# Altium PCB ark.PcbDoc
Units mm, origin at the board's own origin, x right, y up, seen from the top; angles counter-clockwise.
Board outline 141.3 x 9.3 mm, 2 copper layers (Top Layer, Bottom Layer); 12 components, 2 nets, 26 pads, 0 vias.
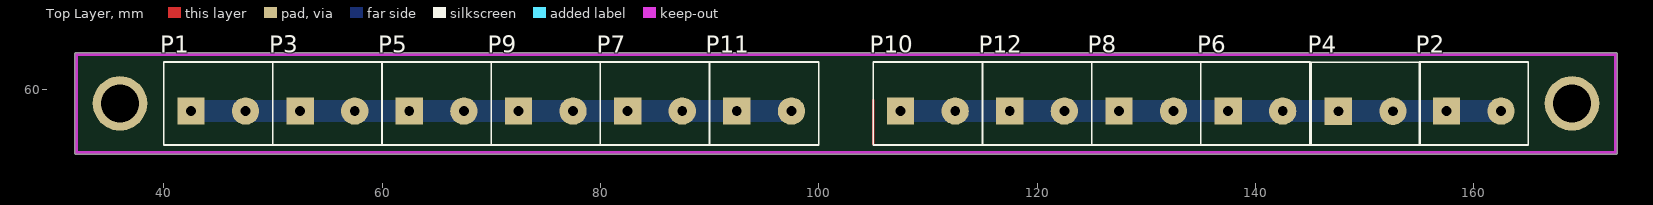
[diagram p0: Top Layer view]
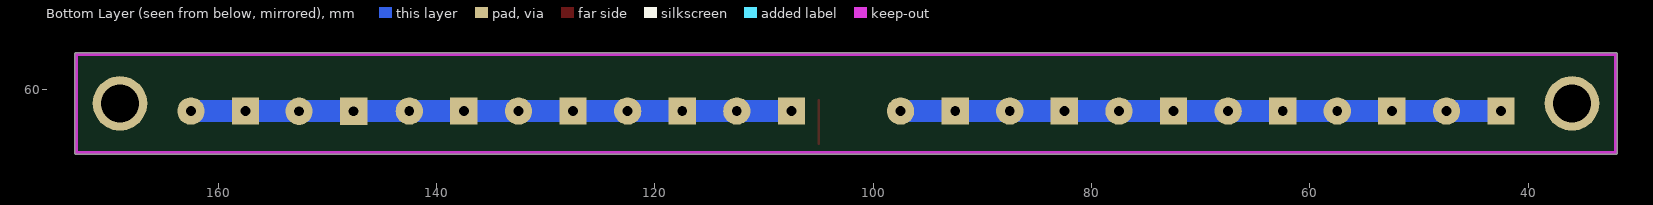
[diagram p1: Bottom Layer view, seen from below]
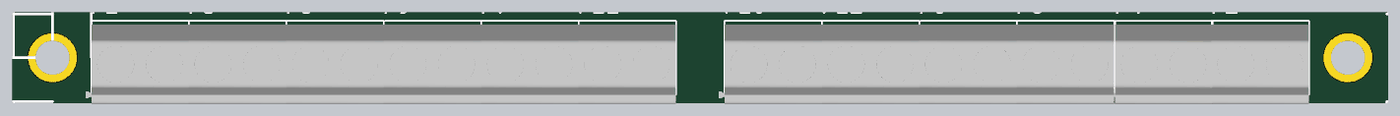
[diagram p2: 3D render of the assembled board from above, using the file's embedded part models]

## Layer stack, top to bottom
Top Layer: signal copper 0.0356
Dielectric: dielectric 0.32, FR-4, Dk 4.8
Bottom Layer: signal copper 0.0356

## Board outline
32,54.05 cw(c32,54.2) 31.85,54.2 31.85,63.2 cw(c32,63.2) 32,63.35 173,63.35 cw(c173,63.2) 173.15,63.2 173.15,54.2 cw(c173,54.2) 173,54.05

## Design rules (kind name [scope] priority, off if disabled: settings)
Clearance [All] p1: gap=0.254
ComponentClearance [All] p1 off: gap=0.254 collisioncheckmode=3 verticalgap=0.254 showdistances=FALSE
PolygonConnect [All] p1: connectstyle=Relief reliefconductorwidth=0.254 reliefentries=4 polygonreliefangle="90 Angle" airgapwidth=0.254
RoutingVias [All] p1: holewidth=0.711 width=1.27 viastyle="Through Hole" minholewidth=0.711 minwidth=1.27 maxholewidth=0.711 maxwidth=1.27
SolderMaskExpansion [All] p1: expansion=0.102
Width [All] p1: maxlimit=10 minlimit=1 preferedwidth=2
27 further rules are at their usual default settings.

## Classes and differential pairs
component class ark: P3 P4 P5 P6 P7 P8 P9 P10 P11 P12

## Components (designator, comment, footprint, x,y, rotation, side; value= is the part's Value field where it differs from the comment)
P1 "ARK 2-Pin" ARK-5mm-2pin 45,58 r0 top
P2 "ARK 2-Pin" ARK-5mm-2pin 160,58 r0 top
P3 "ARK 2-Pin" ARK-5mm-2pin 55,58 r0 top
P4 "ARK 2-Pin" ARK-5mm-2pin 150.1,57.988 r0 top
P5 "ARK 2-Pin" ARK-5mm-2pin 65,58 r0 top
P6 "ARK 2-Pin" ARK-5mm-2pin 140,58 r0 top
P7 "ARK 2-Pin" ARK-5mm-2pin 85,58 r0 top
P8 "ARK 2-Pin" ARK-5mm-2pin 130,58 r0 top
P9 "ARK 2-Pin" ARK-5mm-2pin 75,58 r0 top
P10 "ARK 2-Pin" ARK-5mm-2pin 110,58 r0 top
P11 "ARK 2-Pin" ARK-5mm-2pin 95,58 r0 top
P12 "ARK 2-Pin" ARK-5mm-2pin 120,58 r0 top

## Footprints (in the part's own frame and the unit in brackets; to place one, negate y for a bottom-side part, rotate by r counter-clockwise, add the part's x,y. Pads: shape width x height; smd on the part's side, far side on the other; paste and mask are expansions set on the pad)
ARK-5mm-2pin [mm]
  rect 2.5x2.5 hole 0.9: 1(-2.5,0)
  round 2.5 hole 0.9: 2(2.5,0)
  silkscreen extent -5,-3.1 5,4.5, body extent -5.59,-4.05 4.99,4.1, height 10

## Free pads (board coordinates)
  round 5 hole 3.5: 1(36,58.7) 1(169,58.7)

## Nets (pads, with @x,y where several pads share a name; then routed paths per layer and width w, separated by ;. In a path a pad name is that pad's centre, name@x,y a point inside that pad or via, vN(x,y) a via of type N, cw(c..) or ccw(c..) an arc to the next point about the centre after c; other vN are vias at no path point)
NetP1_1: P1.1 P1.2 P3.1 P3.2 P5.1 P5.2 P7.1 P7.2 P9.1 P9.2 P11.1 P11.2 | length 55
  Bottom Layer w2: P1.1 P1.2 P3.1 P3.2 P5.1 P5.2 P9.1 P9.2 P7.1 P7.2 P11.1 P11.2
NetP2_1: P2.1 P2.2 P4.1 P4.2 P6.1 P6.2 P8.1 P8.2 P10.1 P10.2 P12.1 P12.2 | length 55
  Bottom Layer w2: P10.1 P10.2 P12.1 P12.2 P8.1 P8.2 P6.1 P6.2 152.588,58 P4.2 152.612,58 P2.1 P2.2
copper on no net: | length 4.4
  Top Layer w0.2: 105,55 105,59
  Bottom Layer w0.2: 35.1,58.7 35.5,58.7

## Keep-outs
Keep-Out Layer:
  lines w0.3: 32,54.2 32,63.2 173,63.2 173,54.2 32,54.2

## Dimensions
36,58.7 to 32,54.2 on Top Overlay
36,58.7 to 40,62.5 on Top Overlay
36,58.7 to 32,63.2 on Top Overlay
36,58.7 to 32,63.2 on Top Overlay
173,54.2 to 173,63.2 on Top Overlay
32,54.2 to 173,54.2 on Top Overlay